# EAGLE board InkTime_Board (EAGLE 9.7.0)
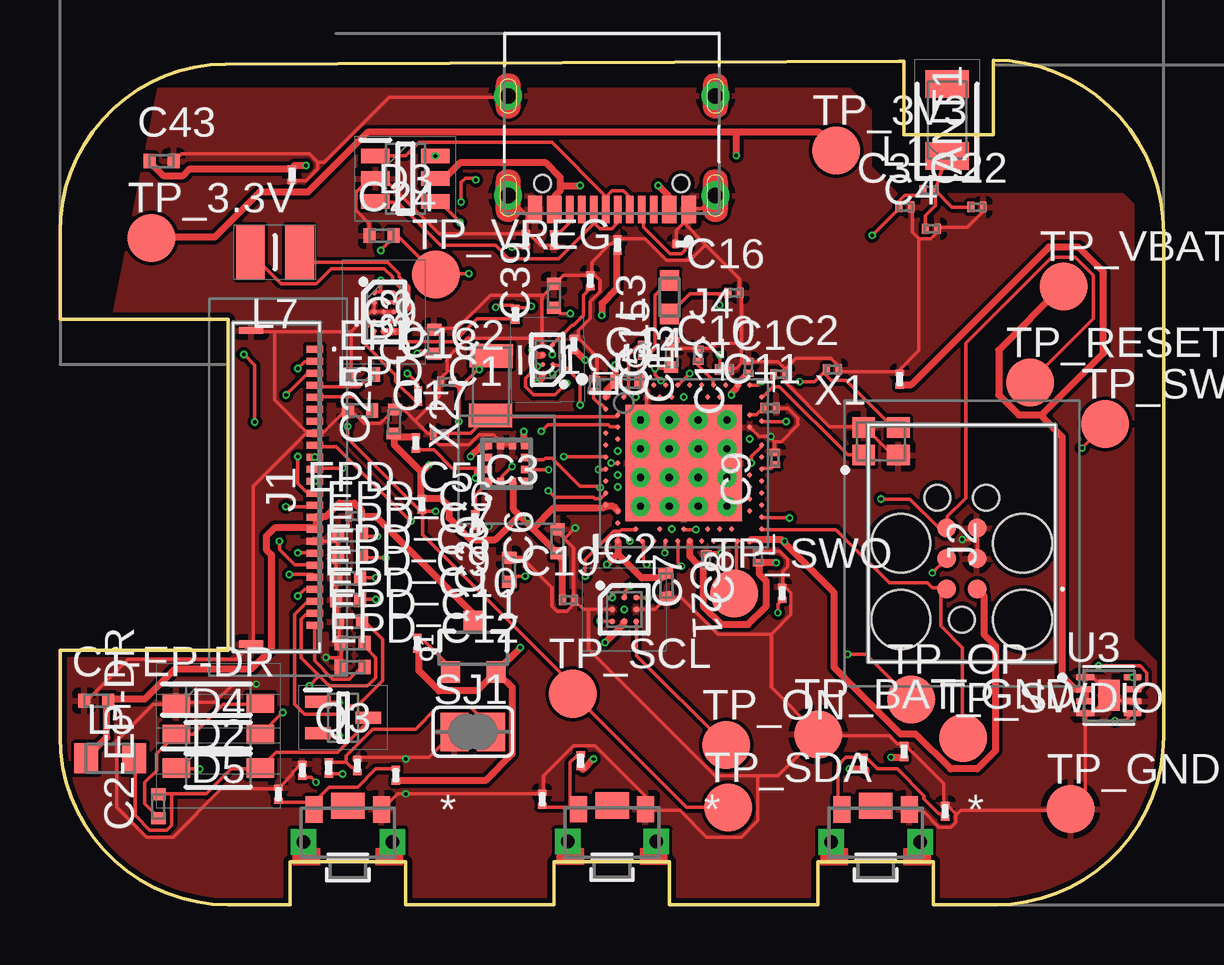
[diagram p0: board, top side]
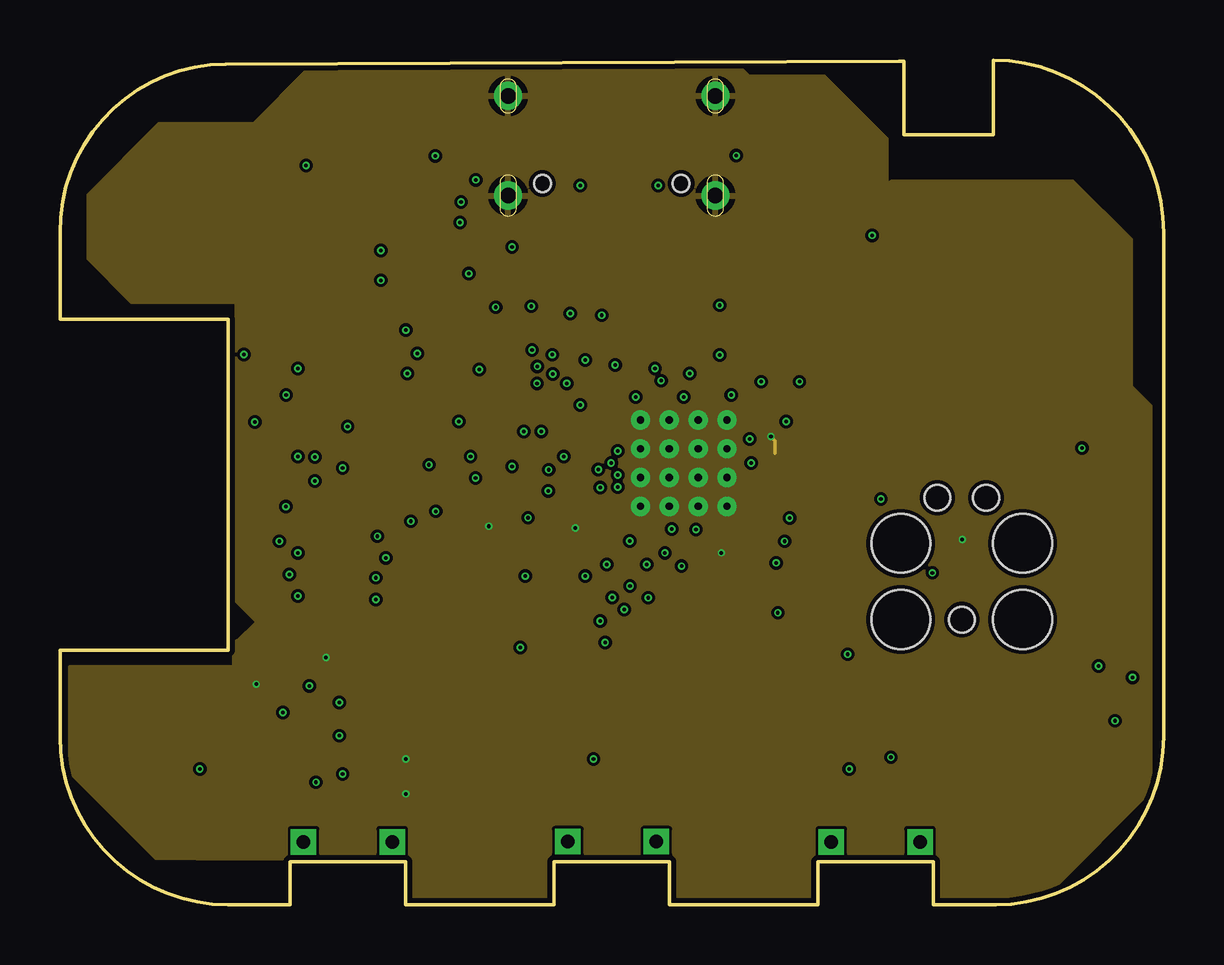
[diagram p1: board, inner layer Route2]
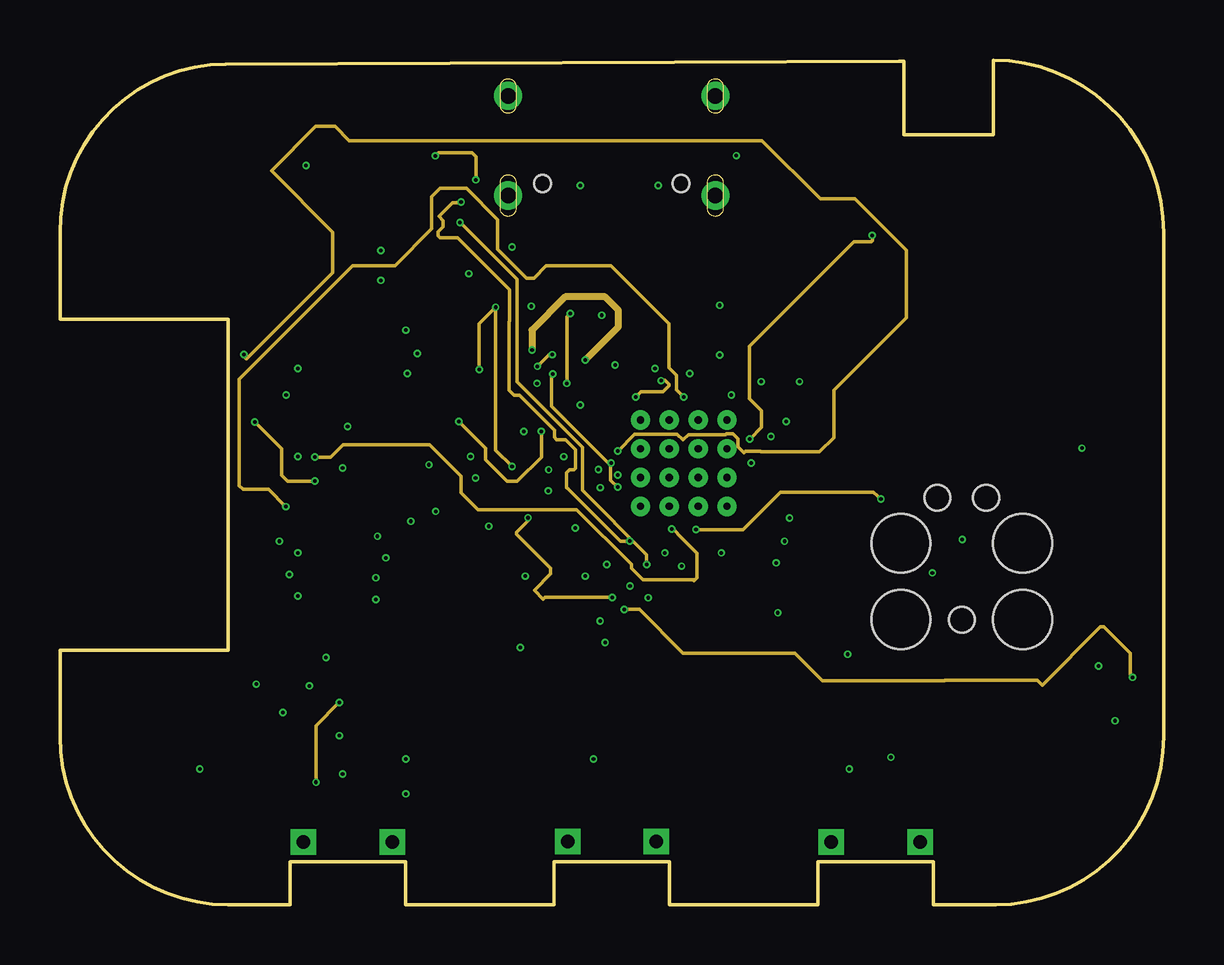
[diagram p2: board, inner layer Route15]
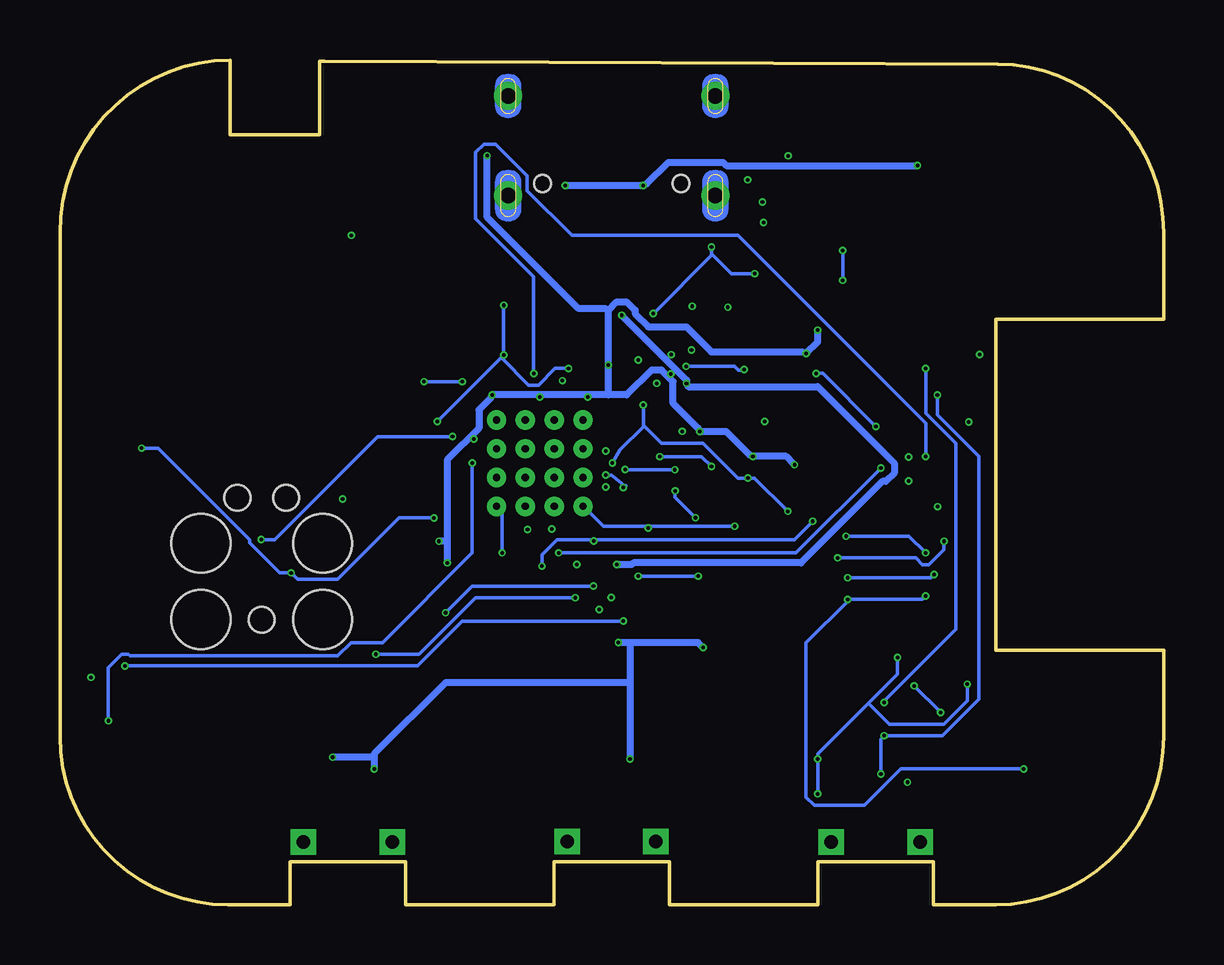
[diagram p3: board, bottom side, seen from below]

Size 46 x 35.2 mm. Coordinates in mm from the lower left corner, seen from the top.
Outline: 39,0 36.4,0 36.4,1.8 31.6,1.8 31.6,0 25.4,0 25.4,1.8 20.6,1.8 20.6,0 14.4,0 14.4,1.8 9.6,1.8 9.6,0 7,0 arc-90 0,7 0,10.6 7,10.6 7,24.4 0,24.4 0,28 arc-90 6.9,35.02 34.98,35.15 35.17,35.15 35.17,32.08 38.91,32.08 38.91,35.2 arc-90 46,28 46,7 arc-90 39,0
Copper layers (1+2*15+16): Top 0.035mm / dielectric 1.6mm / Route2 0.035mm / dielectric 0.15mm / Route15 0.035mm / dielectric 0.2mm / Bottom 0.035mm
Design rules "jlcpcb-2layers.dru *": minimum track width 0.15mm, minimum drill 0.15mm, track to track 5mil, track to pad 5mil, pad to pad 5mil, via to via 5mil, smd to smd 5mil, copper to edge 0.2mm, drill to drill 6mil, minimum pad ring 10mil, minimum via ring 3mil, stop-mask expansion 4mil, vias tented up to drill 0mil, thermal gap 10mil
Net classes: 0 default: width 0.15 mm; 2 Power: width 0.12 mm

## Footprints (pad centres in the part's own frame; a part is rotated, then mirrored left to right if it is on the bottom)
2450AT18B100E_ANTC3216X140N = smd 1.15 x 1.8: 1 -1.5,0; 2 1.5,0
NORDIC_NRF_3_RESC0201_L = smd 0.28 x 0.43: 1 -0.255,0; 2 0.255,0
NORDIC_NRF_3_RESC0402_L = smd 0.5 x 0.6: 1 -0.5,0; 2 0.5,0
GRM011R60J152KE01L_1_0201 = smd 0.35 x 0.25: 1 0,0.275; 2 0,-0.275
ESP32_C6_LIBRARY_5_SOD3716X135N = smd 1.15 x 0.8: 1 -1.75,0; 2 1.75,0
ESP32_C6_LIBRARY_3_SOT95P280X145-6N = smd 1.2 x 0.6: 1 -1.25,0.95; 2 -1.25,0; 3 -1.25,-0.95; 4 1.25,-0.95; 5 1.25,0; 6 1.25,0.95
BQ25180YBGR_BGA8C40P2X4_100X155X50 = smd 0.2 x 0.2: A1 -0.2,0.6; A2 0.2,0.6; B1 -0.2,0.2; B2 0.2,0.2; C1 -0.2,-0.2; C2 0.2,-0.2; D1 -0.2,-0.6; D2 0.2,-0.6
DRV2605YZFR_BGA9C50P3X3_144X144X62 = smd 0.25 x 0.25: A1 -0.5,0.5; A2 0,0.5; A3 0.5,0.5; B1 -0.5,0; B2 0,0; B3 0.5,0; C1 -0.5,-0.5; C2 0,-0.5; C3 0.5,-0.5
BMA423_BMA423 = smd 0.3 x 0.35: 1 -0.75,-0.775; 2 -0.25,-0.775; 3 0.25,-0.775; 4 0.75,-0.775; 7 0.75,0.775; 8 0.25,0.775; 9 -0.25,0.775; 10 -0.75,0.775 | smd 0.35 x 0.3: 5 0.775,-0.25; 6 0.775,0.25; 11 -0.775,0.25; 12 -0.775,-0.25
RT6160AWSC_BGA15C40P3X5_140X230X60 = smd 0.216 x 0.216: A1 -0.4,0.8; A2 0,0.8; A3 0.4,0.8; B1 -0.4,0.4; B2 0,0.4; B3 0.4,0.4; C1 -0.4,0; C2 0,0; C3 0.4,0; D1 -0.4,-0.4; D2 0,-0.4; D3 0.4,-0.4; E1 -0.4,-0.8; E2 0,-0.8; E3 0.4,-0.8
503480-2400_5034802400 = smd 0.3 x 0.7: 1 -5.75,1.525; 2 -5.25,1.525; 3 -4.75,1.525; 4 -4.25,1.525; 5 -3.75,1.525; 6 -3.25,1.525; 7 -2.75,1.525; 8 -2.25,1.525; 9 -1.75,1.525; 10 -1.25,1.525; 11 -0.75,1.525; 12 -0.25,1.525; 13 0.25,1.525; 14 0.75,1.525; 15 1.25,1.525; 16 1.75,1.525; 17 2.25,1.525; 18 2.75,1.525; 19 3.25,1.525; 20 3.75,1.525; 21 4.25,1.525; 22 4.75,1.525; 23 5.25,1.525; 24 5.75,1.525 | smd 0.3 x 1: MP1 -6.54,-1.125; MP2 6.54,-1.125
TC2030-IDC_TC2030IDC = smd 0.783 x 0.783: 1 -0.953,-0.635; 2 -0.953,0.635; 3 0.317,-0.635; 4 0.317,0.635; 5 1.588,-0.635; 6 1.588,0.635 | hole 2.451: -2.223,-2.54; -2.223,2.54; 0.952,-2.54; 0.952,2.54 | hole 1.067: -2.223,0; 2.857,-1.016; 2.857,1.016
KH-TYPE-C-16P_KINGHELM_KH-TYPE-C-16P = smd 0.6 x 1.15: A1_B12 -3.2,4.725; A4_B9 -2.4,4.725; A9_B4 2.4,4.725; A12_B1 3.2,4.725 | smd 0.3 x 1.15: A5 -1.25,4.725; A6 -0.25,4.725; A7 0.25,4.725; A8 1.25,4.725; B5 1.75,4.725; B6 0.75,4.725; B7 -0.75,4.725; B8 -1.75,4.725 | drill 0.65 pad 1.05: SH1 -4.32,0; SH2 4.32,0; SH3 -4.32,4.15; SH4 4.32,4.15 | hole 0.7: -2.89,3.65; 2.89,3.65
NORDIC_NRF_2_RESC0201_L = smd 0.28 x 0.43: 1 -0.255,0; 2 0.255,0
NORDIC_NRF_2_RESC0603_L = smd 0.85 x 0.8: 1 -0.7,0; 2 0.7,0
NORDIC_NRF_2_RESC0805_L = smd 1 x 1.25: 1 -1,0; 2 1,0
MLP2016SR47MT0S1_INDC2016X100N = smd 1.2 x 2.2: 1 -1.028,0; 2 1.028,0
ESP32_C6_LIBRARY_4_ESP32_C6_LIBRARY_4_ESP32_C6_LIBRARY_4_ESP32_C6_LIBRARY_4_ESP32_WROVER_SPARKFUN-DISCRETESEMI_SOT23-3 = smd 0.8 x 0.9: 1 -0.95,-1; 2 0.95,-1; 3 0,1.1
ESP32_C6_LIBRARY_6_SOT65P210X110-3N = smd 1.05 x 0.5: 1 -1.05,0.65; 2 -1.05,-0.65; 3 1.05,0
ERA-1AEB3401C_0201 = smd 0.35 x 0.25: 1 0,0.275; 2 0,-0.275
CPF0201D7K68C1_0201 = smd 0.35 x 0.25: 1 0,0.275; 2 0,-0.275
ESP32_C6_LIBRARY_7_JUMPER_SJ = smd 1.168 x 1.6: 1 -0.762,0; 2 0.762,0
2025-10-22_07-23-44_LIBRARY_SW_EVP-AKE31A_PAN = smd 0.711 x 1.092: 1 -1.4,-0.972; 2 1.4,-0.972 | drill 0.559 pad 0.914 square: 3 -1.848,0.381; 4 1.848,0.381 | smd 1.397 x 1.092: 5 0,-1.124
HECTOR_WATCH_1_TP20R = smd 2 x 2: TP 0,0
NORDIC_NRF_4_AQFN50P700X700X85_HS-74N = smd 4.85 x 4.85: P$74 0,0 | drill 0.3 pad 0.6: P$75 -1.8,1.8; P$76 -0.6,1.8; P$77 0.6,1.8; P$78 1.8,1.8; P$79 -1.8,0.6; P$80 -0.6,0.6; P$81 0.6,0.6; P$82 1.8,0.6; P$83 -1.8,-0.6; P$84 -0.6,-0.6; P$85 0.6,-0.6; P$86 1.8,-0.6; P$87 -1.8,-1.8; P$88 -0.6,-1.8; P$89 0.6,-1.8; P$90 1.8,-1.8 | smd 0.2 x 0.2: P$A8 -1.25,3.25; P$A10 -0.75,3.25; P$A12 -0.25,3.25; P$A14 0.25,3.25; P$A16 0.75,3.25; P$A18 1.25,3.25; P$A20 1.75,3.25; P$A22 2.25,3.25; P$A23 2.75,3.25; P$AA24 3.25,-2.25; P$AB2 -2.75,-2.5; P$AC5 -2,-2.75; P$AC9 -1,-2.75; P$AC11 -0.5,-2.75; P$AC13 0,-2.75; P$AC15 0.5,-2.75; P$AC17 1,-2.75; P$AC19 1.5,-2.75; P$AC21 2,-2.75; P$AC24 3.25,-2.75; P$AD2 -2.75,-3.25; P$AD4 -2.25,-3.25; P$AD6 -1.75,-3.25; P$AD8 -1.25,-3.25; P$AD10 -0.75,-3.25; P$AD12 -0.25,-3.25; P$AD14 0.25,-3.25; P$AD16 0.75,-3.25; P$AD18 1.25,-3.25; P$AD20 1.75,-3.25; P$AD22 2.25,-3.25; P$AD23 2.75,-3.25; P$B1 -3.25,2.75; P$B3 -2.5,2.75; P$B5 -2,2.75; P$B7 -1.5,2.75; P$B9 -1,2.75; P$B11 -0.5,2.75; P$B13 0,2.75; P$B15 0.5,2.75; P$B17 1,2.75; P$B19 1.5,2.75; P$B24 3.25,2.75; P$C1 -3.25,2.25; P$D2 -2.75,2; P$D23 2.75,2; P$E24 3.25,1.75; P$F2 -2.75,1.5; P$F23 2.75,1.5; P$G1 -3.25,1.25; P$H2 -2.75,1; P$H23 2.75,1; P$J1 -3.25,0.75; P$J24 3.25,0.75; P$K2 -2.75,0.5; P$L1 -3.25,0.25; P$L24 3.25,0.25; P$M2 -2.75,0; P$N1 -3.25,-0.25; P$N24 3.25,-0.25; P$P2 -2.75,-0.5; P$P23 2.75,-0.5; P$R1 -3.25,-0.75; P$R24 3.25,-0.75; P$T2 -2.75,-1; P$T23 2.75,-1; P$U1 -3.25,-1.25; P$U24 3.25,-1.25; P$V23 2.75,-1.5; P$W1 -3.25,-1.75; P$W24 3.25,-1.75; P$Y2 -2.75,-2; P$Y23 2.75,-2
ESP32_C6_LIBRARY_SON50P200X200X80-9N = smd 0.76 x 0.27: 1 -0.985,0.75; 2 -0.985,0.25; 3 -0.985,-0.25; 4 -0.985,-0.75; 5 0.985,-0.75; 6 0.985,-0.25; 7 0.985,0.25; 8 0.985,0.75 | smd 0.9 x 1.3: 9 0,0
NORDIC_NRF_BT-XTAL_2016_N = smd 0.95 x 0.85: 1 -0.725,-0.575; 2 0.725,-0.575; 3 0.725,0.575; 4 -0.725,0.575
NORDIC_NRF_1_XTAL_3215_N = smd 1 x 1.8: 1 -1.25,0; 2 1.25,0

## Placement (x,y rotation side)
ANT1  2450AT18B100E_2450AT18B100E  [2450AT18B100E_ANTC3216X140N]  36.98,32.7 90 top
C1  12pF  [NORDIC_NRF_3_RESC0201_L]  30,22.1 0 top
C1-EP-DR  10uF  [NORDIC_NRF_3_RESC0402_L]  1.5,8.5 0 top
C2  12pF  [NORDIC_NRF_3_RESC0201_L]  32.2,22.3 0 top
C2-EP-DR  4.7uF/50V  [NORDIC_NRF_3_RESC0402_L]  4.1,4.1 90 top
C3  1pF  [NORDIC_NRF_3_RESC0201_L]  35.22,29.07 0 top
C4  1pF  [NORDIC_NRF_3_RESC0201_L]  36.32,28.17 0 top
C5  100nF  [NORDIC_NRF_3_RESC0201_L]  22.25,21.65 262.9 top
C6  4.7µF  [NORDIC_NRF_3_RESC0402_L]  20.74,15.15 90 top
C7  100nF  [NORDIC_NRF_3_RESC0201_L]  26.94,14.37 90 top
C8  100nF  [NORDIC_NRF_3_RESC0201_L]  29.1,14.5 90 top
C9  820pF  [NORDIC_NRF_3_RESC0201_L]  29.8,18.6 90 top
C10  N. C.  [NORDIC_NRF_3_RESC0201_L]  27.7,22.3 0 top
C11  100pF  [NORDIC_NRF_3_RESC0201_L]  29.6,20.7 0 top
C12  100nF  [NORDIC_NRF_3_RESC0201_L]  28.7,22.4 90 top
C13  N. C.  [NORDIC_NRF_3_RESC0201_L]  26.6,22.9 90 top
C14  4.7µF  [NORDIC_NRF_3_RESC0402_L]  23.7,21.8 0 top
C15  1µF  [NORDIC_NRF_3_RESC0402_L]  25.5,22.9 87.6 top
C16  47nF  [NORDIC_NRF_3_RESC0201_L]  28.1,25.5 0 top
C17  12pF  [NORDIC_NRF_3_RESC0201_L]  15.82,19.6 0 top
C18  12pF  [NORDIC_NRF_3_RESC0201_L]  16.12,21.79 0 top
C19  100nF  [NORDIC_NRF_3_RESC0201_L]  21.2,12.7 0 top
C20  4.7µF  [NORDIC_NRF_3_RESC0402_L]  18.73,13.96 90 top
C21  4.7µF  [NORDIC_NRF_3_RESC0402_L]  25.28,13.31 272.3 top
C22  N. C.  [NORDIC_NRF_3_RESC0201_L]  38.22,29.07 0 top
C23  0.1uF  [GRM011R60J152KE01L_1_0201]  19.42,27.72 0 top
C24  10uF  [NORDIC_NRF_3_RESC0402_L]  13.41,27.88 0 top
C25  22uF  [NORDIC_NRF_3_RESC0402_L]  13.94,20.14 87.5 top
C27  0.1uF  [GRM011R60J152KE01L_1_0201]  35,21.9 0 top
C29  1uF  [GRM011R60J152KE01L_1_0201]  9.1,4.6 0 top
C30  1uF  [GRM011R60J152KE01L_1_0201]  36.9,3.9 0 top
C31  1uF  [GRM011R60J152KE01L_1_0201]  20.1,4.4 0 top
C32  1uF  [GRM011R60J152KE01L_1_0201]  30.1,12.98 0 top
C33  22uF  [NORDIC_NRF_3_RESC0402_L]  15.6,23.46 90 top
C34  0.1uF  [GRM011R60J152KE01L_1_0201]  35.18,6.38 0 top
C37  1uF  [GRM011R60J152KE01L_1_0201]  21.42,23.35 0 top
C38  1uF  [GRM011R60J152KE01L_1_0201]  23.24,27.49 0 top
C39  10uF  [NORDIC_NRF_3_RESC0402_L]  20.6,25.36 90 top
C42  0.1uF  [GRM011R60J152KE01L_1_0201]  9.67,30.42 0 top
C43  4.7uF  [NORDIC_NRF_3_RESC0402_L]  4.23,30.99 0 top
D2  MBR0530  [ESP32_C6_LIBRARY_5_SOD3716X135N]  6.6,7.1 0 top
D3  ESP32_C6_LIBRARY_3_USBLC6-2SC6Y  [ESP32_C6_LIBRARY_3_SOT95P280X145-6N]  14.4,30.25 0 top
D4  MBR0530  [ESP32_C6_LIBRARY_5_SOD3716X135N]  6.6,8.4 0 top
D5  MBR0530  [ESP32_C6_LIBRARY_5_SOD3716X135N]  6.6,5.7 0 top
EPD_C1  1uF/50V  [NORDIC_NRF_3_RESC0402_L]  12.5,20.6 0 top
EPD_C2  1uF/50V  [NORDIC_NRF_3_RESC0402_L]  12.6,22.1 0 top
EPD_C5  0.1uF/50V  [NORDIC_NRF_3_RESC0201_L]  12.3,16.2 0 top
EPD_C6  1uF/50V  [NORDIC_NRF_3_RESC0402_L]  12.1,15.4 0 top
EPD_C7  1uF/50V  [NORDIC_NRF_3_RESC0402_L]  12.1,14.5 0 top
EPD_C8  1uF/50V  [NORDIC_NRF_3_RESC0402_L]  12,13.6 0 top
EPD_C9  1uF/50V  [NORDIC_NRF_3_RESC0402_L]  12,12.7 0 top
EPD_C10  1uF/50V  [NORDIC_NRF_3_RESC0402_L]  12.1,11.8 0 top
EPD_C11  1uF/50V  [NORDIC_NRF_3_RESC0402_L]  12.2,10.9 0 top
EPD_C12  1uF/50V  [NORDIC_NRF_3_RESC0402_L]  12.2,9.9 0 top
IC1  BQ25180YBGR_BQ25180YBGR  [BQ25180YBGR_BGA8C40P2X4_100X155X50]  20.33,22.71 180.9 top
IC2  DRV2605YZFR_DRV2605YZFR  [DRV2605YZFR_BGA9C50P3X3_144X144X62]  23.52,12.31 0 top
IC3  BMA423_BMA423  [BMA423_BMA423]  18.62,18.38 0 top
IC9  RT6160AWSC_RT6160AWSC  [RT6160AWSC_BGA15C40P3X5_140X230X60]  13.51,24.7 0 top
J1  503480-2400_503480-2400  [503480-2400_5034802400]  9.1,17.4 270 top
J2  TC2030-IDC_TC2030-IDC  [TC2030-IDC_TC2030IDC]  37.59,14.1 90 top
J4  KH-TYPE-C-16P_KH-TYPE-C-16P  [KH-TYPE-C-16P_KINGHELM_KH-TYPE-C-16P]  23,33.7 180 top
L1  3.9nH  [NORDIC_NRF_2_RESC0201_L]  36.22,29.77 0 top
L2  15nH  [NORDIC_NRF_2_RESC0201_L]  24.3,23.1 90 top
L3  10µH  [NORDIC_NRF_2_RESC0603_L]  25.41,25.32 90 top
L5  68uH  [NORDIC_NRF_2_RESC0805_L]  2.1,6.1 0 top
L7  MLP2016SR47MT0S1_FTC252012SR47MBCA  [MLP2016SR47MT0S1_INDC2016X100N]  8.96,27.18 0 top
Q1  20V/4.2A/52mΩ/1.4W  [ESP32_C6_LIBRARY_4_ESP32_C6_LIBRARY_4_ESP32_C6_LIBRARY_4_ESP32_C6_LIBRARY_4_ESP32_WROVER_SPARKFUN-DISCRETESEMI_SOT23-3]  17.23,10.69 0 top
Q3  ESP32_C6_LIBRARY_6_SI1308EDL-T1-GE3  [ESP32_C6_LIBRARY_6_SOT65P210X110-3N]  11.8,7.8 0 top
R1_EP_DR  0.47  [ERA-1AEB3401C_0201]  11.2,5.7 0 top
R1_USB  5K1  [ERA-1AEB3401C_0201]  25.94,27.53 90 top
R2  0  [CPF0201D7K68C1_0201]  18.99,24.6 0 top
R2_EP_DR  10K  [ERA-1AEB3401C_0201]  10.1,5.6 0 top
R2_USB  5K1  [ERA-1AEB3401C_0201]  20.6,27.7 0 top
R3  0  [CPF0201D7K68C1_0201]  17.3,16.03 180 top
R4  0  [CPF0201D7K68C1_0201]  14.93,21.2 0 top
R5  10k  [ERA-1AEB3401C_0201]  33.5,5.9 0 top
R7  10k  [ERA-1AEB3401C_0201]  14,5.4 0 top
R8  10k  [ERA-1AEB3401C_0201]  21.7,6 0 top
R9  10K  [CPF0201D7K68C1_0201]  22.1,26 0 top
R17  3K3  [CPF0201D7K68C1_0201]  14.84,19.24 0 top
R18  3K3  [CPF0201D7K68C1_0201]  15.08,16.68 0 top
R_PWR_EPD  10k  [ERA-1AEB3401C_0201]  14.9,10.9 0 top
R_TYPE_SEL  2.2  [ERA-1AEB3401C_0201]  12.4,5.8 0 top
SJ1  [ESP32_C6_LIBRARY_7_JUMPER_SJ]  17.21,7.2 0 top
SW_DN  2025-10-22_07-23-44_LIBRARY_EVP-AKE31ASW_EVP-AKE31A_PAN  [2025-10-22_07-23-44_LIBRARY_SW_EVP-AKE31A_PAN]  12,3 180 top
SW_ENT  2025-10-22_07-23-44_LIBRARY_EVP-AKE31ASW_EVP-AKE31A_PAN  [2025-10-22_07-23-44_LIBRARY_SW_EVP-AKE31A_PAN]  23.01,3.01 180 top
SW_UP  2025-10-22_07-23-44_LIBRARY_EVP-AKE31ASW_EVP-AKE31A_PAN  [2025-10-22_07-23-44_LIBRARY_SW_EVP-AKE31A_PAN]  34,3 180 top
TP_3.3V  HECTOR_WATCH_1_TPTP20R  [HECTOR_WATCH_1_TP20R]  3.82,27.79 0 top
TP_3V3  HECTOR_WATCH_1_TPTP20R  [HECTOR_WATCH_1_TP20R]  32.36,31.43 0 top
TP_BAT_GND  HECTOR_WATCH_1_TPTP20R  [HECTOR_WATCH_1_TP20R]  31.6,7.1 0 top
TP_GND  HECTOR_WATCH_1_TPTP20R  [HECTOR_WATCH_1_TP20R]  42.13,3.98 0 top
TP_ON  HECTOR_WATCH_1_TPTP20R  [HECTOR_WATCH_1_TP20R]  27.77,6.65 0 top
TP_OP  HECTOR_WATCH_1_TPTP20R  [HECTOR_WATCH_1_TP20R]  35.48,8.55 0 top
TP_RESET  HECTOR_WATCH_1_TPTP20R  [HECTOR_WATCH_1_TP20R]  40.43,21.75 0 top
TP_SCL  HECTOR_WATCH_1_TPTP20R  [HECTOR_WATCH_1_TP20R]  21.37,8.79 0 top
TP_SDA  HECTOR_WATCH_1_TPTP20R  [HECTOR_WATCH_1_TP20R]  27.86,4.05 0 top
TP_SWDCLK  HECTOR_WATCH_1_TPTP20R  [HECTOR_WATCH_1_TP20R]  43.57,20.03 0 top
TP_SWDIO  HECTOR_WATCH_1_TPTP20R  [HECTOR_WATCH_1_TP20R]  37.65,6.95 0 top
TP_SWO  HECTOR_WATCH_1_TPTP20R  [HECTOR_WATCH_1_TP20R]  28.11,12.97 0 top
TP_VBAT  HECTOR_WATCH_1_TPTP20R  [HECTOR_WATCH_1_TP20R]  41.83,25.77 0 top
TP_VREG  HECTOR_WATCH_1_TPTP20R  [HECTOR_WATCH_1_TP20R]  15.66,26.25 0 top
U1  NORDIC_NRF_4_NRF52840_QF  [NORDIC_NRF_4_AQFN50P700X700X85_HS-74N]  26,18.4 0 top
U3  ESP32_C6_LIBRARY_MAX17048G+T10  [ESP32_C6_LIBRARY_SON50P200X200X80-9N]  43.72,8.73 0 top
X1  32MHz  [NORDIC_NRF_BT-XTAL_2016_N]  34.23,19.31 0 top
X2  32.768kHz  [NORDIC_NRF_1_XTAL_3215_N]  17.96,21.63 89.2 top

## Library data of the parts
ANT1 = InkTime_v5; ARROW_PART_NUMBER: 2450AT18B100E; ARROW_PRICE-STOCK: https://www.arrow.com/en/products/2450at18b100e/johanson-dielectrics?utm_currency=USD&region=nac; DESCRIPTION: Antennas 2.45GHz ANTENNA; HEIGHT: 1.4mm; MANUFACTURER_NAME: JOHANSON TECHNOLOGY; MANUFACTURER_PART_NUMBER: 2450AT18B100E; MOUSER_PART_NUMBER: 609-2450AT18B100E; MOUSER_PRICE-STOCK: https://www.mouser.co.uk/ProductDetail/Johanson-Technology/2450AT18B100E?qs=yCnrNFeXz%252Bh5MFsFIXGZGA%3D%3D
C1 C1-EP-DR C2 C2-EP-DR C3-C25 C27 C29-C34 C37-C39 C42 C43 EPD_C1 EPD_C2 EPD_C5-EPD_C12 L1-L3 L5 R1_EP_DR R1_USB R2 R2_EP_DR R2_USB R3-R5 R7-R9 R17 R18 R_PWR_EPD R_TYPE_SEL SJ1 TP_3.3V TP_3V3 TP_BAT_GND TP_GND TP_ON TP_OP TP_RESET TP_SCL TP_SDA TP_SWDCLK TP_SWDIO TP_SWO TP_VBAT TP_VREG U1 X1 X2 = InkTime_v5
D2 D4 D5 = InkTime_v5; AVAILABILITY: In Stock; CHECK_PRICES: https://www.snapeda.com/parts/MBR0530/Onsemi/view-part/?ref=eda; DESCRIPTION: Diode Schottky 30 V 500mA Surface Mount SOD-123; MF: ON Semiconductor; MP: MBR0530; PACKAGE: SOD-123-2 ON Semiconductor; PRICE: None; PURCHASE-URL: https://www.snapeda.com/api/url_track_click_mouser/?unipart_id=179458&manufacturer=ON Semiconductor&part_name=MBR0530&search_term=None; SNAPEDA_LINK: https://www.snapeda.com/parts/MBR0530/Onsemi/view-part/?ref=snap
D3 = InkTime_v5; AVAILABILITY: In Stock; CHECK_PRICES: https://www.snapeda.com/parts/USBLC6-2SC6Y/STMicroelectronics/view-part/?ref=eda; DESCRIPTION: 17V Clamp 5A (8/20µs) Ipp Tvs Diode Surface Mount SOT-23-6; MF: STMicroelectronics; MP: USBLC6-2SC6Y; PACKAGE: SOT-23-6 STMicroelectronics; PRICE: None; SNAPEDA_LINK: https://www.snapeda.com/parts/USBLC6-2SC6Y/STMicroelectronics/view-part/?ref=snap
IC1 = InkTime_v5; ARROW_PART_NUMBER: BQ25180YBGR; ARROW_PRICE-STOCK: https://www.arrow.com/en/products/bq25180ybgr/texas-instruments?utm_currency=USD&region=nac; DESCRIPTION: Charger IC Lithium Ion/Polymer, Lithium Iron Phosphate 8-DSBGA (1.6x1.1); HEIGHT: 0.5mm; MANUFACTURER_NAME: Texas Instruments; MANUFACTURER_PART_NUMBER: BQ25180YBGR; MOUSER_PART_NUMBER: 595-BQ25180YBGR; MOUSER_PRICE-STOCK: https://www.mouser.co.uk/ProductDetail/Texas-Instruments/BQ25180YBGR?qs=doiCPypUmgEWjAK%252BJAX6Tw%3D%3D
IC2 = InkTime_v5; ARROW_PART_NUMBER: DRV2605YZFR; ARROW_PRICE-STOCK: https://www.arrow.com/en/products/drv2605yzfr/texas-instruments?region=nac; DESCRIPTION: Haptic Driver for ERM/LRA with Built-In Library and Smart Loop Architecture; HEIGHT: 0.625mm; MANUFACTURER_NAME: Texas Instruments; MANUFACTURER_PART_NUMBER: DRV2605YZFR
IC3 = InkTime_v5; ARROW_PART_NUMBER: BMA423; ARROW_PRICE-STOCK: https://www.arrow.com/en/products/bma423/bosch; DESCRIPTION: Accelerometers Triaxial low-g 12bit Acceleration Sensor; HEIGHT: 1mm; MANUFACTURER_NAME: BOSCH; MANUFACTURER_PART_NUMBER: BMA423; MOUSER_PART_NUMBER: 262-BMA423; MOUSER_PRICE-STOCK: https://www.mouser.co.uk/ProductDetail/Bosch-Sensortec/BMA423?qs=HXFqYaX1Q2xC%252BSgeGoX3mg%3D%3D
IC9 = InkTime_v5; DESCRIPTION: Buck-Boost Regulator Positive Output Step-Up/Step-Down I2C DC-DC Controller IC 15-WL-CSP (BSC) (1.4x2.3); HEIGHT: 0.6mm; MANUFACTURER_NAME: RICHTEK; MANUFACTURER_PART_NUMBER: RT6160AWSC; MOUSER_PART_NUMBER: 835-RT6160AWSC; MOUSER_PRICE-STOCK: https://www.mouser.co.uk/ProductDetail/Richtek/RT6160AWSC?qs=amGC7iS6iy%2FLd9PSoixZXQ%3D%3D
J1 = InkTime_v5; DESCRIPTION: FFC & FPC Connectors 0.5mm FPC RA SMT Dual Contact 24Ckt; HEIGHT: 1.87mm; MANUFACTURER_NAME: Molex; MANUFACTURER_PART_NUMBER: 503480-2400; MOUSER_PART_NUMBER: 538-503480-2400; MOUSER_PRICE-STOCK: https://www.mouser.co.uk/ProductDetail/Molex/503480-2400?qs=OAhjpuo3Vu7efIoxFh9AOw%3D%3D
J2 = InkTime_v5; DESCRIPTION: CABLE ADAPTER 6 POS; HEIGHT: 19mm; MANUFACTURER_NAME: Tag Connect; MANUFACTURER_PART_NUMBER: TC2030-IDC
J4 = InkTime_v5; AVAILABILITY: Not in stock; CHECK_PRICES: https://www.snapeda.com/parts/KH-TYPE-C-16P/Kinghelm/view-part/?ref=eda; MF: kinghelm; MP: KH-TYPE-C-16P; PACKAGE: None; PRICE: None; SNAPEDA_LINK: https://www.snapeda.com/parts/KH-TYPE-C-16P/Kinghelm/view-part/?ref=snap
L7 = InkTime_v5; DESCRIPTION: SMD / SMT Inductors (Coils), L=0.47?H, L x W x T :; HEIGHT: 1mm; JLCPCB: https://jlcpcb.com/partdetail/6763488-FTC252012SR47MBCA/C5832368; MANUFACTURER_NAME: TDK; MANUFACTURER_PART_NUMBER: FTC252012SR47MBCA
Q1 = InkTime_v5; PROD_ID: TRAN-14388
Q3 = InkTime_v5; AVAILABILITY: In Stock; CHECK_PRICES: https://www.snapeda.com/parts/SI1308EDL-T1-GE3/Vishay+Siliconix/view-part/?ref=eda; DESCRIPTION: Si1308EDL-T1-GE3 N-channel MOSFET Transistor, 1.5 A, 30 V, 3-Pin SC-70 | Siliconix / Vishay SI1308EDL-T1-GE3; MF: Vishay Siliconix; MP: SI1308EDL-T1-GE3; PACKAGE: SOT-323 Vishay Semiconductor; PRICE: None; PURCHASE-URL: https://www.snapeda.com/api/url_track_click_mouser/?unipart_id=274603&manufacturer=Vishay Siliconix&part_name=SI1308EDL-T1-GE3&search_term=None; SNAPEDA_LINK: https://www.snapeda.com/parts/SI1308EDL-T1-GE3/Vishay+Siliconix/view-part/?ref=snap
SW_DN SW_ENT SW_UP = InkTime_v5; COPYRIGHT: Copyright (C) 2025 Ultra Librarian. All rights reserved.; DIGI-KEY_PART_NUMBER_1: P123437TR-ND; DIGI-KEY_PART_NUMBER_2: P123437CT-ND; DIGI-KEY_PART_NUMBER_3: P123437DKR-ND; MANUFACTURER_NAME: Panasonic; MANUFACTURER_PART_NUMBER: EVP-AKE31A
U3 = InkTime_v5; AVAILABILITY: In Stock; CHECK_PRICES: https://www.snapeda.com/parts/MAX17048G+T10/Analog+Devices/view-part/?ref=eda; DESCRIPTION: 3µA 1-Cell/2-Cell Fuel Gauge with ModelGauge; MF: Analog Devices; MP: MAX17048G+T10; PACKAGE: TDFN-8 Maxim; PRICE: None; PURCHASE-URL: https://www.snapeda.com/api/url_track_click_mouser/?unipart_id=329239&manufacturer=Analog Devices&part_name=MAX17048G+T10&search_term=None; SNAPEDA_LINK: https://www.snapeda.com/parts/MAX17048G+T10/Analog+Devices/view-part/?ref=snap

## Nets
3V3/1.7D [Power]: C34.2 IC2.C2 Q1.2 R5.2 R7.2 R8.2 R_PWR_EPD.2
3V3/2.4A [Power]: C6.1 C7.1 C8.1 C12.1 C14.1 C19.1 C25.1 C33.1 IC3.3 IC3.7 IC3.10 IC9.E2 IC9.E3 J2.1 R17.1 R18.1 TP_3.3V.TP TP_3V3.TP U1.P$A22 U1.P$AD14 U1.P$AD23 U1.P$B1 U1.P$W1 U1.P$Y2
ALERT: U1.P$J24 U3.5
D+: D3.4 U1.P$AD6
D-: D3.6 U1.P$AD4
DN: D3.1 J4.A7 J4.B7
DP: D3.3 J4.A6 J4.B6
EPD_3V3 [Power]: C1-EP-DR.2 EPD_C5.2 J1.15 J1.16 L5.1 Q1.3
EPD_BUSY: J1.9 U1.P$AD12
EPD_CS: J1.12 U1.P$K2
EPD_DC: J1.11 U1.P$AD10
EPD_RST: J1.10 U1.P$AC11
GDR: J1.2 Q3.1 R2_EP_DR.2
GND [HIGH_CURRENT]: C1-EP-DR.1 C1.2 C2.2 C3.2 C4.2 C5.1 C6.2 C7.2 C8.2 C9.2 C10.2 C11.2 C12.2 C13.2 C14.2 C15.2 C16.2 C17.1 C18.1 C19.2 C20.2 C21.2 C22.2 C23.1 C24.1 C25.2 C27.1 C29.1 C30.1 C31.1 C32.1 C33.2 C34.1 C37.1 C38.1 C39.2 C42.2 C43.2 D3.2 D4.1 EPD_C1.1 EPD_C2.1 EPD_C5.1 EPD_C6.1 EPD_C7.1 EPD_C8.1 EPD_C9.1 EPD_C10.1 EPD_C11.1 EPD_C12.1 IC1.D2 IC2.B1 IC2.B3 IC3.8 IC3.9 IC9.B1 IC9.C1 IC9.C2 IC9.C3 J1.8 J1.17 J1.MP1 J1.MP2 J2.3 J2.5 J4.A1_B12 J4.A12_B1 J4.SH1 J4.SH2 J4.SH3 J4.SH4 R1_USB.1 R2_EP_DR.1 R2_USB.2 R3.1 R9.1 R_TYPE_SEL.1 SJ1.1 SW_DN.1 SW_ENT.1 SW_UP.1 TP_BAT_GND.TP TP_GND.TP U1.P$74 U1.P$75 U1.P$76 U1.P$77 U1.P$78 U1.P$79 U1.P$80 U1.P$81 U1.P$82 U1.P$83 U1.P$84 U1.P$85 U1.P$86 U1.P$87 U1.P$88 U1.P$89 U1.P$90 U1.P$B7 U1.P$F23 U3.1 U3.4 U3.6 U3.9 X1.2 X1.4
HAPTIC_EN: IC2.A1 U1.P$U1
IMU_INT1: IC3.5 U1.P$N1
IMU_INT2: IC3.6 U1.P$P2
LX1: IC9.B2 IC9.B3 L7.1
LX2: IC9.D2 IC9.D3 L7.2
MOSI: J1.14 U1.P$B13
N$1: C5.2 U1.P$C1
N$2: L2.2 U1.P$B3
N$3: L2.1 L3.2
N$4: C2.1 U1.P$A23 X1.3
N$6: C20.1 U1.P$AC5
N$11: C9.1 U1.P$N24
N$13: C11.1 U1.P$D23
N$14: C13.1 U1.P$A18
N$15: C3.1 L1.1 U1.P$H23
N$16: C10.1 C15.1 C16.1 L3.1 U1.P$B5 U1.P$E24
N$17: ANT1.1 C4.1 C22.1 L1.2
N$18: C1.1 U1.P$B24 X1.1
N$19: C17.2 U1.P$D2 X2.1
N$20: C18.2 U1.P$F2 X2.2
N$24: IC1.D1 R9.2
N$28: IC9.E1 R2.2
N$29: IC9.D1 R4.2
N$31: IC3.1 R3.2
N$32: C32.2 IC2.A2
N$40: J4.A5 R1_USB.2
N$41: J4.B5 R2_USB.1
N$43: EPD_C2.2 J1.4
N$44: EPD_C1.2 J1.5
N$46: EPD_C6.2 J1.18
N$47: EPD_C7.2 J1.19
N$48: EPD_C8.2 J1.20
N$50: EPD_C10.2 J1.22
N$52: EPD_C12.2 J1.24
N$54: C2-EP-DR.2 D5.2 L5.2 Q3.3
N$55: C2-EP-DR.1 D2.1 D4.2
N$58: R1_EP_DR.1 R_TYPE_SEL.2 SJ1.2
OUT+: IC2.A3 TP_OP.TP
OUT-: IC2.C3 TP_ON.TP
P0.04: U1.P$J1
P0.09: U1.P$L24
P0.13: U1.P$AD8
P0.13/1.5D: C30.2 R5.1 SW_UP.2
P0.14: U1.P$AC9
P0.14/1.5D: C31.2 R8.1 SW_ENT.2
P0.19: U1.P$AC15
P0.20: U1.P$AD16
P0.21: U1.P$AC17
P0.22: U1.P$AD18
P0.23: U1.P$AC19
P0.24: U1.P$AD20
P0.25: U1.P$AC21
P0.26: U1.P$G1
P0.27: U1.P$H2
P1.01: U1.P$Y23
P1.01/1.6C: Q1.1 R_PWR_EPD.1
P1.02: U1.P$W24
P1.02/1.6C: C29.2 R7.1 SW_DN.2
P1.03: U1.P$V23
P1.04: U1.P$U24
P1.05: U1.P$T23
P1.06: U1.P$R24
P1.07: U1.P$P23
P1.09: U1.P$R1
P1.10: U1.P$A20
P1.11: U1.P$B19
P1.12: U1.P$B17
P1.13: U1.P$A16
P1.14: U1.P$B15
P1.15: U1.P$A14
P1.28: U1.P$B11
P1.29: U1.P$A10
P1.30: U1.P$B9
P1.31: U1.P$A8
PMIC_INT: IC1.A1 U1.P$T2
PREVGH: D5.1 EPD_C9.2 J1.21
PREVGL: D2.2 EPD_C11.2 J1.23
RESE: J1.3 Q3.2 R1_EP_DR.2
RESET: J2.6 TP_RESET.TP U1.P$AC13
SCK: J1.13 U1.P$A12
SCL/1.4C: IC2.C1 U3.7
SCL/2.4C: IC1.B1 IC3.12 R4.1 R17.2 R18.2 TP_SCL.TP TP_SDA.TP U1.P$M2
SDA/1.4C: IC2.B2 U3.8
SDA/2.4C: IC1.C1 IC3.2 R2.1 U1.P$L1
SWDCLK: J2.4 TP_SWDCLK.TP U1.P$AA24
SWDIO: J2.2 TP_SWDIO.TP U1.P$AC24
SWO: TP_SWO.TP U1.P$AD22
VBAT/1.2A [Power]: C27.2 TP_VBAT.TP U3.2 U3.3
VBAT/2.5C [Power]: C37.2 IC1.C2
VBUS/1.5D [Power]: C42.1 C43.1 D3.5 J4.A4_B9 J4.A9_B4
VBUS/2.6D [Power]: C21.1 C38.2 IC1.A2 U1.P$AD2
VREG: C23.2 C24.2 C39.1 IC1.B2 IC9.A1 IC9.A2 IC9.A3 TP_VREG.TP

## Tracks (layer width: path | path; a pad name or v marks a point on that pad's centre or on a via)
3V3/1.7D  (via drill 0.15, 0.15 pad 0.3)
  Top 0.3: R8.2 21.8,5.63 | 21.8,5.63 21.8,5.62 | 33.6,5.53 33.6,5.62 R5.2 33.39,5.66 v32.9,5.66 | v22.72,10.92 23.48,11.68 23.48,11.75 IC2.C2 | v19.19,10.71 18.22,9.74 Q1.2 | R7.2 14.07,5.17 17.74,5.17 18.84,6.28 18.84,9.05 18.29,9.61 Q1.2 | v22.24,6.07 21.8,5.63 | v34.63,6.14 35.12,6.14 C34.2 | R_PWR_EPD.2 14.97,10.57 14.97,9.74 15.8,8.91 17.39,8.91 18.08,9.61 Q1.2
  Bottom 0.3: 22.24,10.92 19.4,10.92 v19.19,10.71 | 22.24,10.92 v22.72,10.92 | 22.24,10.92 22.24,9.26 | 22.24,9.26 v22.24,6.07 | 32.9,6.14 32.9,6.28 29.93,9.26 22.24,9.26 | 32.9,6.14 v32.9,5.66 | 32.9,6.14 v34.63,6.14
3V3/2.4A  (via drill 0.15)
  Top 0.3: 28.19,32.18 31.66,32.18 32.35,31.49 TP_3V3.TP | 28.19,32.18 12.82,32.18 10.33,29.69 8.32,29.69 6.45,27.82 3.89,27.82 TP_3.3V.TP | 30.06,15.21 28.82,15.21 U1.P$AD23 | 30.06,15.21 32.28,13 32.28,9.88 35.05,7.11 35.67,7.11 37.13,5.66 38.23,5.66 39,6.42 39,10.78 38.51,11.27 38.51,12.86 38.23,13.14 J2.1 | 22.79,16.6 23.07,16.6 23.21,16.46 U1.P$Y2 | 22.79,16.6 U1.P$W1 | 19.71,15.66 20.71,14.66 C6.1 20.78,14.52 20.92,14.38 20.92,12.72 C19.1 | 19.71,15.66 19.16,16.22 | 19.16,16.22 18.91,16.46 18.91,17.57 IC3.3 | 19.71,15.66 20.58,16.53 22.65,16.53 22.79,16.6 | U1.P$AD14 26.25,14.52 26.6,14.18 26.88,14.18 C7.1 26.81,14.04 26.81,12.45 27.57,11.68 28.68,11.68 29.44,12.45 29.44,13.48 29.16,13.76 29.16,14.18 C8.1 29.3,14.25 v29.86,14.25 | IC9.E2 13.51,23.87 13.86,23.87 IC9.E3 14,23.87 14.34,23.87 v14.41,23.94 | v14.9,22.97 C33.1 | U1.P$B1 22.79,21.17 22.79,21.45 23.14,21.79 C14.1 23.14,21.93 v23.14,22.49 | 28.26,21.66 28.26,21.72 28.68,22.14 C12.1 | 28.26,21.66 U1.P$A22 | 15.04,18.05 15.04,17.02 R18.1 15.18,16.95 15.87,16.95 16.21,16.6 16.21,16.11 17.11,15.21 18.15,15.21 19.16,16.22 | 15.04,18.05 13.93,19.16 13.93,19.58 C25.1 14.07,19.51 R17.1 | v17.11,18.68 17.53,19.09 17.81,19.09 IC3.10 | v15.38,18.33 15.18,18.12 15.04,18.05 | v19.33,19.72 19.33,19.16 IC3.7 | v27.99,21.24 27.99,21.31 28.19,21.52 28.26,21.66 | v30.2,15.15 30.06,15.21 | v28.19,31.21 28.19,32.18
  Bottom 0.3: v14.41,23.94 14.41,23.45 v14.9,22.97 15.04,23.04 18.84,23.04 19.88,24.08 21.48,24.08 22.03,24.63 22.03,24.77 22.38,25.12 22.79,25.12 23.14,24.77 | v15.38,18.33 15.73,18.68 v17.11,18.68 17.25,18.75 18.22,19.72 v19.33,19.72 19.4,19.85 20.44,20.89 20.44,21.79 20.92,22.28 21.34,22.28 22.38,21.24 23.14,21.24 | 23.14,21.24 v27.99,21.24 28.05,21.1 28.54,20.62 28.54,19.85 29.86,18.54 29.86,15.15 | 23.14,21.24 v23.14,22.49 23.14,24.77 | 29.86,15.15 v29.86,14.25 | 29.86,15.15 v30.2,15.15 | v28.19,31.21 28.19,28.65 24.39,24.84 23.28,24.84 23.14,24.77
ALERT  (via drill 0.15)
  Top 0.15: v28.82,18.4 28.82,18.68 29.23,19.09 U1.P$J24 | v43.98,7.67 44.4,7.67 44.67,7.94 U3.5
  Bottom 0.15: v28.82,18.4 28.82,14.66 32.56,10.92 33.87,10.92 34.43,10.37 43.08,10.37 43.15,10.44 43.43,10.44 43.98,9.88 v43.98,7.67
D+  (via drill 0.15)
  Top 0.15: v24.45,14.18 24.32,14.31 24.32,15.15 U1.P$AD6 | v16.67,28.43 15.8,29.3 D3.4
  Route15 0.15: v24.45,14.18 24.45,14.59 21.78,17.27 21.78,19.06 19.05,21.79 19.05,26.05 v16.67,28.43
D-  (via drill 0.15)
  Top 0.15: v16.72,29.28 16.72,30.09 16.9,30.28 17.26,30.28 v17.34,30.2
  Route15 0.15: U1.P$AD4 23.36,15.15 21.13,17.38 21.11,17.38 21.11,17.99 21.25,18.13 21.43,18.13 21.49,18.19 21.49,18.96 21.07,19.38 20.71,19.38 20.62,19.47 20.62,19.77 19.16,21.22 18.94,21.22 18.72,21.44 18.72,24.28 18.75,24.32 18.75,25.63 16.58,27.8 15.84,27.8 15.77,27.87 15.77,28.04 15.98,28.26 15.98,28.51 15.8,28.68 | 15.8,28.68 | 15.8,28.68 16.36,29.24 16.72,29.24 v16.72,29.28 | v17.34,30.2 17.34,31.17 17.17,31.34 15.79,31.34 D3.6
  other vias: 23.75,15.15 15.65,31.2
DN
  Top 0.15: J4.B7 23.69,28.99 23.69,29.55 23.48,29.76 23,29.76 22.79,29.55 22.79,28.99 J4.A7 22.72,29.55 20.51,31.77 14.97,31.77 14.41,31.21 13.17,31.21 D3.1
DP
  Top 0.15: 22.31,28.37 22.31,28.93 J4.B6 | 22.31,28.37 22.52,28.16 23,28.16 23.21,28.37 23.21,28.93 J4.A6 | D3.3 13.17,29.27 14.07,29.27 15.87,27.47 18.15,27.47 18.71,26.92 20.78,26.92 22.24,28.37 22.31,28.37
EPD_3V3
  Top 0.3: L5.1 1.12,6.14 1.95,6.97 1.95,8.5 C1-EP-DR.2 2.09,8.57 3.54,8.57 4.79,9.81 7.97,9.81 8.8,10.64 8.8,14.59 8.6,14.8 8.6,15.35 8.94,15.7 10.54,15.7 J1.16 10.67,15.7 10.67,16.05 J1.15 10.67,16.18 11.09,16.18 11.64,16.74 12.27,16.74 12.54,16.46 12.54,16.25 EPD_C5.2 12.68,16.18 13.17,16.18 17.18,12.17 17.18,11.82 Q1.3
EPD_BUSY  (via drill 0.15)
  Top 0.15: v25.91,14.11 25.77,14.25 25.77,15.15 U1.P$AD12 | v14.62,15.98 11.51,19.09 10.67,19.09 J1.9
  Bottom 0.15: v25.91,14.11 25.91,14.59 25.29,15.21 15.38,15.21 v14.62,15.98
EPD_CS  (via drill 0.15)
  Top 0.152: v7.67,22.93 8.12,22.48 v8.12,20.12
  Route15 0.152: U1.P$K2 23.96,19.61 25.73,19.61 25.97,19.37 26.19,19.59 27.74,19.59 27.78,19.63 28.04,19.63 28.25,19.42 28.25,19.09 28.5,18.84 28.57,18.9 29.19,18.9 29.23,18.87 31.66,18.87 32.26,19.46 32.26,21.44 35.28,24.46 35.28,27.27 33.13,29.41 31.7,29.41 29.27,31.84 12.04,31.84 11.46,32.43 10.66,32.43 8.81,30.58 11.37,28.03 11.37,26.34 7.79,22.75 7.75,22.75 7.67,22.84 v7.67,22.93 | v8.12,20.12 9.24,19 9.24,17.9 9.48,17.65 J1.12
  other vias: 23.25,18.9 10.62,17.65
EPD_DC  (via drill 0.15)
  Top 0.15: v25.22,14.66 25.22,15.15 U1.P$AD10 | v11.78,18.19 10.67,18.19 J1.11
  Bottom 0.15: v25.22,14.66 15.31,14.66 v11.78,18.19
EPD_RST  (via drill 0.15)
  Route15 0.15: J1.10 11.29,18.65 11.81,19.17 15.42,19.17 16.73,17.86 16.73,17.17 17.44,16.46 21.54,16.46 23.82,14.18 23.82,14.01 24.29,13.54 26.4,13.54 26.44,13.5 | 26.44,13.5 | 26.44,13.5 26.56,13.62 26.56,14.65 26,15.22 25.92,15.3 | 25.91,15.3 25.92,15.3 | 25.92,15.3 25.56,15.65 U1.P$AC11
  other vias: 10.62,18.65 25.5,15.65
GDR  (via drill 0.15)
  Top 0.15: v10.67,5.1 10.47,5.31 10.12,5.31 R2_EP_DR.2 | v11.64,8.43 10.81,8.43 Q3.1 | v9.91,22.35 10.19,22.62 10.6,22.62 J1.2
  Route15 0.15: v10.67,5.1 10.67,7.46 v11.64,8.43
  Bottom 0.15: v9.91,22.35 9.91,20.48 8.66,19.23 8.66,11.47 11.64,8.5 v11.64,8.43
GND  (via drill 0.15, 0.15 pad 0.3)
  Top 0.15: R2_EP_DR.1 10.05,5.87 9.7,5.52 9.7,5.45 9.15,4.9 C29.1 9.08,4.83 6.73,4.83 4.72,2.82 3.61,2.82 2.36,4.07 2.36,6.84 3.89,8.36 4.79,8.36 D4.1 4.86,8.43 6.45,8.43 7.21,9.19 v8.18,9.19 | 11.71,10.3 11.71,10.85 EPD_C11.1 11.64,10.92 11.64,11.75 EPD_C10.1 11.57,11.82 11.57,12.72 EPD_C9.1 11.51,12.72 11.51,13.55 EPD_C8.1 11.51,13.62 11.51,14.52 EPD_C7.1 11.57,14.52 11.57,15.35 EPD_C6.1 | 11.71,10.3 11.71,9.95 EPD_C12.1 | EPD_C5.1 11.99,16.18 11.99,15.77 11.64,15.42 EPD_C6.1 | J1.17 10.67,15.15 11.51,15.15 EPD_C6.1 | 14.41,6.14 15.38,6.14 16.42,7.18 SJ1.1 | 14.41,6.14 12.4,6.14 R_TYPE_SEL.1 | SW_DN.1 13.44,4 14.07,4.62 v14.41,4.62 20.09,4.62 C31.1 20.16,4.69 20.16,5.38 21.41,6.63 22.31,6.63 24.39,4.55 24.39,4 SW_ENT.1 24.45,3.93 25.84,3.93 26.95,2.82 28.4,2.82 29.09,3.51 29.09,5.38 | v14.41,6.07 14.41,6.14 | v11.09,10.3 11.71,10.3 | U3.9 43.77,8.71 43.08,8.01 42.8,8.01 U3.4 42.74,7.94 42.74,4.55 42.18,4 TP_GND.TP 42.11,3.93 37.54,3.93 37.4,3.79 37.34,3.79 | U3.6 44.67,8.5 44.05,8.5 43.84,8.71 U3.9 | U3.1 42.8,9.47 43.08,9.47 43.77,8.77 U3.9 | IC2.B3 24.04,12.31 24.8,12.31 25.29,12.79 C21.2 25.35,12.79 25.91,12.79 27.43,11.27 29.65,11.27 | C8.2 29.16,14.73 29.99,14.73 30.34,14.38 30.34,14.11 30.13,13.9 30.13,13.28 C32.1 30.2,13.28 30.48,13 30.48,12.1 29.65,11.27 | 22.03,12.31 21.82,12.31 21.48,12.65 C19.2 | 22.03,12.31 23,12.31 IC2.B1 | C20.2 18.78,14.45 19.26,14.45 20.51,13.21 20.51,12.45 20.71,12.24 21.13,12.24 21.48,12.58 C19.2 | 21.03,15.25 21.41,14.87 21.41,12.72 C19.2 | 21.03,15.25 20.78,15.49 20.78,15.63 C6.2 | 37.34,3.79 37.34,3.44 37.13,3.23 36.64,3.23 35.95,3.93 35.47,3.93 SW_UP.1
  Top 0.15: 37.34,3.79 36.92,4.2 C30.1 36.85,4.2 36.85,5.04 35.4,6.49 35.33,6.49 35.19,6.63 C34.1 35.12,6.7 34.91,6.7 34.56,7.04 31.66,7.04 TP_BAT_GND.TP | 22.03,12.31 22.03,10.64 27.29,5.38 29.09,5.38 | 29.09,5.38 29.93,5.38 31.59,7.04 TP_BAT_GND.TP | 29.65,11.27 29.65,9.05 31.59,7.11 TP_BAT_GND.TP | 21.61,23.59 21.48,23.59 C37.1 | 21.61,23.59 22.38,22.83 22.38,22 22.31,21.93 C5.1 | 20.09,25.32 20.09,23.59 | 20.09,23.59 20.09,23.32 IC1.D2 | 20.09,25.32 20.58,25.81 C39.2 20.65,25.88 20.99,26.23 22.1,26.23 R9.1 | R9.1 22.17,26.3 22.17,26.78 22.93,27.54 23,27.54 23.21,27.75 C38.1 23.28,27.75 24.39,27.75 25.29,26.85 26.25,26.85 26.91,27.51 | C33.2 15.66,24.01 16.56,24.01 17.95,25.39 20.09,25.39 20.09,25.32 | 21.61,23.59 21.61,23.94 22.1,24.43 22.1,25.12 22.52,25.53 22.52,26.02 22.24,26.3 R9.1 | C1-EP-DR.1 1.05,8.57 1.19,8.57 2.85,10.23 7.35,10.23 J1.MP2 8.04,10.92 8.04,17.43 10.26,19.65 10.26,19.72 | IC9.C1 13.17,24.7 13.44,24.7 IC9.C2 13.58,24.7 13.86,24.7 IC9.C3 | IC9.B1 13.1,25.05 13.1,24.77 IC9.C1 | 12.13,23.87 12.13,22.14 EPD_C2.1 | 12.13,23.87 13.03,24.77 IC9.C1 | 12.13,23.87 8.94,23.87 | 8.94,23.87 8.04,23.87 J1.MP1 | IC3.8 18.84,19.16 18.43,19.16 IC3.9 18.43,19.23 18.08,19.58 17.46,19.58 17.05,19.16 15.8,19.16 15.59,19.37 15.59,19.58 C17.1 15.52,19.65 15.31,19.65 14.79,20.17 | 14.79,20.17 14.34,20.62 14,20.62 C25.2 13.93,20.62 13.37,20.06 12.68,20.06 12.2,20.55 12.06,20.55 EPD_C1.1 11.99,20.55 11.85,20.55 11.02,19.72 10.67,19.72 J1.8 10.6,19.72 10.26,19.72 | 14.79,20.17 15.8,21.17 15.8,21.72 C18.1 15.94,21.79 15.94,22 16.14,22.21 16.14,22.76 16.98,23.59 20.09,23.59
  Top 0.15: 8.94,23.87 8.94,21.03 10.26,19.72 | X1.2 34.91,18.75 34.7,18.75 33.53,19.92 X1.4 33.46,19.92 32.07,19.92 30.27,21.72 30.27,22.07 C1.2 30.2,22.14 30.2,22.35 | C22.2 38.44,29.06 38.44,28.86 37.82,28.23 36.64,28.23 C4.2 36.57,28.09 36.57,28.03 36.3,27.75 35.81,27.75 | 35.81,27.75 35.53,28.03 35.53,29.06 C3.2 | C15.2 25.56,23.39 25.77,23.18 26.53,23.18 C13.2 26.67,23.18 27.16,23.18 27.36,23.39 28.4,23.39 | 28.44,22.59 28.47,22.62 28.68,22.62 C12.2 28.75,22.62 29.93,22.62 30.2,22.35 | 28.44,22.59 28.19,22.35 27.99,22.35 C10.2 | 28.4,23.39 28.4,22.62 28.44,22.59 | 28.4,23.39 28.4,25.46 C16.2 28.33,25.53 28.33,26.09 26.91,27.51 | 30.2,22.35 30.27,22.35 30.69,22.76 32.14,22.76 32.42,22.49 32.42,22.35 C2.2 32.49,22.28 32.56,22.21 34.98,22.21 C27.1 34.98,22.28 35.81,23.11 35.81,27.75 | 10.74,30.93 10.74,30.66 10.26,30.17 9.7,30.17 C42.2 | 10.74,30.93 10.4,31.28 5.06,31.28 4.79,31 C43.2 | C24.1 12.89,27.89 12.89,28.37 12.34,28.93 12.34,29.69 12.89,30.24 13.1,30.24 D3.2 13.17,30.24 13.51,30.24 15.8,27.96 19.4,27.96 C23.1 | R2_USB.2 20.58,27.47 20.02,27.47 19.47,28.03 C23.1 | 19.47,28.65 19.47,28.09 C23.1 | 19.47,28.65 19.75,28.93 J4.A12_B1 | 26.01,28.41 26.19,28.58 26.19,28.93 J4.A1_B12 26.25,28.99 26.74,28.99 27.29,29.55 J4.SH3 | 26.01,28.41 25.7,28.09 25.7,27.54 R1_USB.1 | 38.23,15.21 38.23,15.63 J2.5 | 38.23,15.21 38.23,14.45 J2.3 | C14.2 24.18,21.79 24.45,21.52 24.45,21.17 U1.P$B7 24.45,21.1 24.45,20.41 24.25,20.2 U1.P$75 | v17.88,15.77 17.32,15.77 R3.1 | v27.57,14.66 26.95,14.66 C7.2 | 29.79,19.3 29.79,18.89 C9.2 | 29.79,19.3 29.65,19.44 v29.63,19.51 | 29.79,19.3 30.06,19.3 30.76,19.99 30.76,20.27 30.34,20.69 29.86,20.69 C11.2
  Top 0.15: v37.61,15.21 38.23,15.21 | 19.47,28.65 19.47,28.72 18.64,29.55 J4.SH4 | 10.74,30.93 11.02,30.93 13.72,33.64 18.64,33.64 J4.SH2 | U1.P$74 26.05,18.33 26.53,17.85 U1.P$85 | 26.01,28.41 26.91,27.51 | v21.48,15.7 21.03,15.25
  Top 0.152: U1.P$F23 29.14,19.51 v29.63,19.51
  Route2 0.152: v29.63,19.51 29.81,19.34 29.81,18.82
  Bottom 0.15: v14.41,4.62 v14.41,6.07 14.41,6.28 12.3,8.39 | v11.09,10.3 11.09,9.61 12.3,8.39 | v8.18,9.19 8.18,8.5 9.15,7.53 11.44,7.53 12.3,8.39 | 21.48,15.77 23.35,15.77 24.18,16.6 U1.P$87 | 21.48,15.77 v17.88,15.77 | v27.57,14.66 27.57,16.39 27.78,16.6 U1.P$90 | v37.61,15.21 37.06,15.21 32.76,19.51 29.65,19.51 v29.63,19.51 | v21.48,15.7 21.48,15.77
  pour Route2: 14.58,1.89 14.59,1.86 14.59,0.14 20.55,0.14 20.55,1.8 20.56,1.82 20.64,1.91 20.67,1.92 25.28,1.92 25.31,1.91 25.39,1.82 25.4,1.8 25.4,0.28 25.49,0.2 31.46,0.2 31.48,0.22 31.48,1.67 31.5,1.7 31.71,1.91 31.74,1.92 36.14,1.92 36.17,1.91 36.23,1.84 36.35,1.84 36.4,1.89 36.43,1.91 36.46,1.91 36.49,1.89 36.51,1.87 36.52,1.84 36.52,0.19 40.46,0.19 40.79,0.51 40.82,0.53 41.26,0.53 45.48,4.74 45.48,20.78 44.66,21.59 44.65,21.62 44.65,27.72 42.22,30.15 34.65,30.15 34.59,30.1 34.57,30.09 34.54,30.09 34.51,30.1 34.49,30.12 34.48,30.15 34.48,31.92 31.87,34.52 28.73,34.52 28.7,34.54 28.48,34.76 10.29,34.76 8.07,32.54 8.04,32.53 4.12,32.53 1.17,29.59 1.17,26.91 2.98,25.1 7.28,25.1 7.31,25.09 7.33,25.07 7.34,25.04 7.34,12.64 8.16,11.82 8.17,11.8 8.17,11.77 8.16,11.74 7.44,11.02 7.41,11 7.36,11 7.24,10.88 7.24,9.98 7.23,9.96 7.21,9.93 7.18,9.92 0.4,9.92 0.4,5.53 3.99,1.94 5.65,1.94 5.66,1.94 5.66,1.94 5.66,1.94 5.68,1.93 5.69,1.92 5.69,1.92 5.69,1.92 5.69,1.92 14.53,1.92 14.56,1.91
  pour Top (isolate 0.15): -0.32,3.99 -0.33,3.96 -4.3,-0.01 44.59,-0.01 50.19,5.59 44.72,11.05 44.71,11.08 44.71,29.16 44.3,29.57 34.94,29.57 34.91,29.59 33.79,30.7 33.78,30.73 33.78,33.09 32.9,33.97 4.1,33.97 0,13.14 0,13.14 0,13.13 -0.01,13.12 -0.01,13.11 -0.01,13.11 -0.02,13.1 -0.02,13.1 -0.03,13.09 -0.03,13.09 -0.04,13.08 -0.05,13.08 -0.05,13.08 -0.06,13.07 -0.07,13.07 -0.08,13.07 -0.08,13.07 -0.32,13.07
HAPTIC_EN  (via drill 0.15, 0.15 pad 0.3)
  Top 0.15: v20.36,17.25 20.63,16.98 22.24,16.98 22.29,16.92 22.52,16.92 U1.P$U1
  Route15 0.15: IC2.A1 20.21,12.81 20.14,12.73 19.78,13.1 | 19.78,13.1 | 19.78,13.1 20.46,13.78 20.46,14.03 19.04,15.45 19.04,15.53 19.51,16 v19.51,16.12
  Bottom 0.15: v19.51,16.12 20.37,16.98 20.37,17.25 v20.36,17.25
  other vias: 23.02,12.81
IMU_INT1  (via drill 0.15 pad 0.3)
  Top 0.15: U1.P$N1 22.72,18.12 v22.45,18.12 v22.44,18.13 | v20.37,18.12 IC3.5
  Bottom 0.15: v20.37,18.12 22.38,18.12 v22.44,18.13
IMU_INT2  (via drill 0.15, 0.15 pad 0.3)
  Top 0.15: IC3.6 19.54,18.54 20.16,18.54 20.23,18.61 20.51,18.61 21.68,17.43 22.52,17.43 v22.52,17.38
  Top 0.152: IC3.6 19.51,18.51
  Bottom 0.15: v22.52,17.38 22.46,17.44 22.42,17.44 22.41,17.45 22.46,17.45 22.95,17.85 23,17.9 U1.P$P2
  other vias: 23.25,17.9
LX1
  Top 0.15: IC9.B2 13.51,25.12 13.86,25.12 IC9.B3 13.93,25.12 14,25.12 14.27,25.39 14.27,25.6 13.86,26.02 13.86,26.16 13.51,26.5 11.3,26.5 10.67,25.88 9.22,25.88 7.97,27.13 L7.1
LX2
  Top 0.15: IC9.D2 13.51,24.29 13.86,24.29 IC9.D3 13.93,24.36 14.07,24.36 14.55,24.84 14.55,25.74 14.14,26.16 14.14,26.3 13.65,26.78 10.4,26.78 10.05,27.13 L7.2
MOSI  (via drill 0.15)
  Top 0.15: J1.14 10.56,16.59 v9.41,16.59
  Route15 0.15: v9.41,16.59 8.7,17.3 7.64,17.3 7.48,17.46 7.48,21.89 12.21,26.62 13.96,26.62 15.5,28.16 15.5,29.5 15.84,29.84 16.95,29.84 18.24,28.55 18.24,27.31 19.45,26.1 19.75,26.1 20.27,26.62 22.97,26.62 25.38,24.2 25.38,22.38 25.69,22.07 25.69,21.46 U1.P$B13
  other vias: 26,21.15
N$1
  Top 0.15: U1.P$C1 22.72,20.69 22.59,20.82 22.52,20.82 22.24,21.1 22.24,21.38 C5.2
N$2
  Top 0.15: 24.14,23.2 L2.2 24.11,23.25 24.04,23.25 23.69,22.9 23.69,21.45 23.55,21.31 23.55,21.17 U1.P$B3
N$3
  Top 0.15: L2.1 24.32,22.9 24.52,22.9 24.8,23.18 24.8,25.39 25.35,25.95 L3.2
N$4  (via drill 0.15)
  Top 0.15: v29.23,21.79 29.09,21.66 28.82,21.66 U1.P$A23 | v30.82,21.79 31.45,21.79 31.93,22.28 C2.1 31.86,22.14 32.14,21.86 32.76,21.86 34.7,19.92 34.91,19.92 X1.3
  Bottom 0.15: v30.82,21.79 v29.23,21.79
N$6  (via drill 0.15)
  Top 0.15: v21.89,13.69 21.89,14.38 23.07,15.56 23.35,15.56 23.41,15.63 23.97,15.63 U1.P$AC5 | v19.4,13.69 18.98,13.69 18.78,13.48 C20.1
  Bottom 0.15: v19.4,13.69 v21.89,13.69
N$11
  Top 0.15: U1.P$N24 29.3,18.19 29.65,18.19 29.79,18.33 C9.1
N$13
  Top 0.15: U1.P$D23 28.82,20.41 29.02,20.41 29.3,20.69 C11.1
N$14
  Top 0.15: U1.P$A18 27.22,21.66 27.22,21.86 26.6,22.49 26.6,22.62 C13.1
N$15  (via drill 0.15)
  Top 0.15: L1.1 35.77,29.57 35.22,29.57 34.97,29.31 C3.1 34.97,29.01 v33.85,27.89
  Route15 0.15: U1.P$H23 29.24,19.89 29.24,20.58 28.73,21.09 28.73,23.27 33.09,27.62 33.82,27.62 33.85,27.66 v33.85,27.89
  other vias: 28.75,19.4
N$16  (via drill 0.15, 0.15 pad 0.3)
  Top 0.15: 27.5,25.46 26.25,25.46 25.42,24.63 L3.1 | 27.5,25.46 27.78,25.46 C16.1 | v30.27,20.13 29.3,20.13 U1.P$E24 | v27.5,22.9 27.5,22.35 C10.1 | C15.1 25.42,22.35 v24.8,22.35 24.8,22.09 v25.06,21.84 | v27.5,24.98 27.5,25.46
  Route15 0.15: U1.P$B5 24.22,21.37 25.14,21.37 25.39,21.62 25.39,21.69 25.23,21.86 25.06,21.86 v25.06,21.84
  Bottom 0.15: v27.5,22.9 v30.27,20.13 | v24.8,22.35 25.36,22.35 26.05,21.66 26.46,21.66 27.57,22.76 v27.5,22.9 | v27.5,22.9 v27.5,24.98
  other vias: 24,21.15
N$17
  Top 0.15: ANT1.1 36.92,31.16 L1.2 | L1.2 37.18,29.07 C22.1 | L1.2 36.48,29.12 36.07,28.71 C4.1
N$18
  Top 0.15: 29.72,21.59 29.3,21.17 U1.P$B24 | 29.72,21.59 29.72,22.07 C1.1 | 29.72,21.59 29.99,21.59 32.83,18.75 33.46,18.75 X1.1
N$19
  Top 0.15: U1.P$D2 23.21,20.34 18.01,20.34 X2.1 17.95,20.34 17.81,20.34 17.11,19.65 16.07,19.65 C17.2
N$20  (via drill 0.15)
  Top 0.15: v20.07,19.72 20.33,19.99 22.86,19.99 22.93,19.92 23.21,19.92 U1.P$F2 | 16.63,21.52 v16.63,20.13 | 16.63,21.52 16.42,21.72 C18.2 | 16.63,21.52 17.95,22.83 X2.2
  Route15 0.15: v20.07,19.72 20.07,18.65 19.05,17.64 18.64,17.64 17.74,18.54 17.74,19.02 v16.63,20.13
N$24
  Top 0.15: IC1.D1 20.58,23.39 21.34,24.15 21.41,24.15 21.82,24.56 21.82,25.39 22.1,25.67 R9.2
N$28
  Top 0.15: IC9.E1 13.1,23.87 13.1,23.73 13.37,23.45 16.42,23.45 17.39,24.43 18.94,24.43 R2.2
N$29
  Top 0.15: IC9.D1 13.1,24.29 13.03,24.29 12.75,24.01 12.75,23.32 14,22.07 14,21.79 14.9,20.89 R4.2
N$31
  Top 0.15: R3.2 17.32,16.32 17.32,17.09 17.81,17.57 IC3.1
N$32  (via drill 0.15)
  Top 0.15: v23.76,13.28 23.55,13.07 23.55,12.86 IC2.A2 | v29.93,12.17 29.93,12.51 30.06,12.65 C32.2
  Bottom 0.15: v23.76,13.28 28.82,13.28 v29.93,12.17
N$40
  Top 0.15: R1_USB.2 26.19,27.47 26.05,27.33 26.05,27.26 25.91,27.13 25.42,27.13 24.32,28.23 24.32,28.93 J4.A5
N$41
  Top 0.15: R2_USB.1 20.65,28.03 20.85,28.03 21.2,28.37 21.2,28.93 J4.B5
N$43
  Top 0.15: EPD_C2.2 13.1,22.07 12.96,22.07 12.47,21.59 10.67,21.59 J1.4
N$44
  Top 0.15: EPD_C1.2 12.96,20.62 12.82,20.62 12.27,21.17 10.67,21.17 J1.5
N$46  (via drill 0.15)
  Top 0.15: v13.24,15.35 12.61,15.35 EPD_C6.2 | v9.91,14.66 10.6,14.66 J1.18
  Bottom 0.15: v13.24,15.35 10.6,15.35 v9.91,14.66
N$47  (via drill 0.15)
  Top 0.15: v13.58,14.45 12.61,14.45 EPD_C7.2 | v9.15,15.15 9.15,14.8 9.77,14.18 10.6,14.18 J1.19
  Bottom 0.15: v13.58,14.45 10.33,14.45 10.05,14.18 9.77,14.18 9.15,14.8 v9.15,15.15
N$48  (via drill 0.15)
  Top 0.15: v13.17,13.62 12.54,13.62 EPD_C8.2 | v9.57,13.76 10.54,13.76 10.6,13.69 J1.20
  Bottom 0.15: v13.17,13.62 9.7,13.62 v9.57,13.76
N$50
  Top 0.15: EPD_C10.2 12.61,11.75 12.75,11.75 13.44,11.06 13.44,9.33 12.4,8.29 12.13,8.29 11.78,7.94 10.19,7.94 9.77,8.36 9.77,12.1 10.26,12.58 10.6,12.58 J1.22
N$52
  Top 0.15: EPD_C12.2 12.68,9.88 12.54,9.88 12.06,9.4 11.37,9.4 10.6,10.16 10.6,11.61 J1.24
N$54
  Top 0.15: 4.65,4.62 6.1,4.62 7.14,5.66 8.32,5.66 D5.2 8.39,5.73 9.01,6.35 11.57,6.35 12.82,7.6 12.82,7.74 Q3.3 | 4.65,4.62 4.16,4.62 C2-EP-DR.2 | 4.65,4.62 4.65,3.3 4.44,3.1 3.75,3.1 3.12,3.72 3.12,6.07 L5.2
N$55
  Top 0.15: C2-EP-DR.1 4.09,3.65 3.54,4.2 3.54,5.1 4.03,5.59 4.03,6.28 4.79,7.04 D2.1 4.86,7.11 5.55,7.11 6.8,8.36 8.32,8.36 D4.2
N$58
  Top 0.15: 11.92,5.94 12.13,5.73 12.2,5.73 12.34,5.59 R_TYPE_SEL.2 | 11.92,5.94 11.23,5.94 R1_EP_DR.1 | 11.92,5.94 11.92,6.21 13.03,7.32 14.83,7.32 15.73,8.22 17.11,8.22 17.95,7.39 17.95,7.25 SJ1.2
OUT+  (via drill 0.15)
  Top 0.15: v24.52,12.79 24.04,12.79 IC2.A3 | v32.83,10.44 33.59,10.44 35.47,8.57 TP_OP.TP
  Bottom 0.15: v24.52,12.79 28.68,12.79 31.03,10.44 v32.83,10.44
OUT-
  Top 0.15: IC2.C3 24.04,11.75 24.04,10.37 27.71,6.7 TP_ON.TP
P0.13/1.5D
  Top 0.15: SW_UP.2 32.56,4 32.42,4.13 32.42,5.8 32.76,6.14 33.46,6.14 R5.1 33.53,6.21 34.08,5.66 34.91,5.66 36.02,4.55 36.02,4.41 36.64,3.79 36.71,3.79 36.85,3.65 C30.2
P0.14/1.5D
  Top 0.15: C31.2 20.16,4.07 21.48,4.07 21.55,4 SW_ENT.2 21.27,4.13 21.27,5.94 21.55,6.21 21.68,6.21 R8.1
P1.01/1.6C
  Top 0.15: R_PWR_EPD.1 14.97,11.13 15.11,10.99 15.18,10.99 16.21,9.95 16.21,9.74 Q1.1
P1.02/1.6C
  Top 0.15: C29.2 9.15,4.27 10.26,4.27 10.54,4 SW_DN.2 10.47,4.13 11.23,4.9 12.4,4.9 13.17,5.66 14,5.66 R7.1
PMIC_INT  (via drill 0.15)
  Route15 0.15: U1.P$T2 22.95,17.7 22.95,18.3 20.48,20.77 20.48,22.06 IC1.A1
  other vias: 23.25,17.4 20.54,22.12
PREVGH  (via drill 0.15)
  Top 0.15: v13.17,12.72 12.54,12.72 EPD_C9.2 | v9.91,12.86 10.19,13.14 10.6,13.14 J1.21 | v5.83,5.66 4.86,5.66 D5.1
  Bottom 0.15: v9.91,12.86 10.05,12.72 v13.17,12.72 13.17,12.65 14.9,10.92 14.9,4.48 14.55,4.13 12.47,4.13 10.95,5.66 v5.83,5.66
PREVGL  (via drill 0.15)
  Top 0.15: 10.81,9.54 10.05,10.3 10.05,11.89 10.26,12.1 10.6,12.1 J1.23 | 10.81,9.54 11.23,9.12 12.82,9.12 13.17,9.47 13.17,10.3 12.75,10.71 12.75,10.85 EPD_C11.2 | v9.29,8.01 8.39,7.11 D2.2 | 10.81,9.54 v10.4,9.12
  Bottom 0.15: v10.4,9.12 v9.29,8.01
RESE  (via drill 0.15)
  Top 0.15: v11.78,5.45 11.23,5.45 R1_EP_DR.2 | v11.64,7.04 10.88,7.04 10.81,7.11 Q3.2 | v9.43,21.24 10.33,22.14 10.6,22.14 J1.3
  Bottom 0.15: v11.78,5.45 11.78,6.9 v11.64,7.04 9.22,7.04 7.7,8.57 7.7,18.68 9.43,20.41 v9.43,21.24
RESET  (via drill 0.15)
  Top 0.15: 36.99,15.7 36.99,16.18 37.75,16.95 37.75,23.39 41.35,26.99 42.32,26.99 43.08,26.23 43.08,24.43 40.45,21.79 TP_RESET.TP | 36.99,15.7 J2.6 | U1.P$AC13 26.02,15.63 v26.51,15.63 | v34.22,16.9 35.43,16.9 36.63,15.7 36.99,15.7
  Route15 0.15: v26.51,15.63 28.47,15.63 30.03,17.19 33.91,17.19 34.06,17.04 | 34.06,17.04 | 34.06,17.04 34.2,16.9 v34.22,16.9
SCK  (via drill 0.15)
  Top 0.15: v26.25,22.14 25.77,21.66 U1.P$A12 | v9.91,18.68 9.91,17.57 10.33,17.15 10.6,17.15 J1.13
  Bottom 0.15: v26.25,22.14 26.25,26.16 28.68,28.58 28.68,31.35 28.33,31.7 27.85,31.7 26.53,30.38 26.53,29.76 24.66,27.89 17.74,27.89 9.91,20.06 v9.91,18.68
SCL/1.4C  (via drill 0.15)
  Top 0.15: v22.52,11.82 23,11.82 IC2.C1 | v43.29,9.95 45.02,9.95 45.3,9.68 45.3,9.26 45.02,8.98 44.74,8.98 U3.7
  Bottom 0.15: v22.52,11.82 29.23,11.82 31.1,9.95 v43.29,9.95
SCL/2.4C  (via drill 0.15)
  Top 0.15: 17.32,18.19 17.81,18.19 IC3.12 | 17.32,18.19 16.35,18.19 15.59,18.95 14.9,18.95 R17.2 | v21.68,20.82 21.68,21.79 20.99,22.49 20.58,22.49 IC1.B1 | U1.P$M2 22.98,18.4 v22.97,18.41 | v17.32,17.78 17.32,18.19 | R18.2 15.11,16.39 15.11,15.42 21.34,9.19 21.34,8.84 TP_SCL.TP 21.41,8.77 26.12,4.07 27.85,4.07 TP_SDA.TP | v14.48,22.14 14.9,21.72 14.9,21.52 R4.1 | v11.99,19.92 11.99,19.44 15.04,16.39 R18.2 | v15.66,16.39 15.18,16.39 R18.2
  Bottom 0.15: 21.68,19.92 v21.68,20.82 | 21.68,19.92 22.66,18.95 v22.97,18.41 | 21.68,19.92 21.61,19.92 20.92,19.23 19.19,19.23 17.74,17.78 v17.32,17.78 17.05,17.78 v15.66,16.39 | v14.48,22.14 14.21,22.14 v11.99,19.92
SDA/1.4C  (via drill 0.15)
  Route15 0.15: IC2.B2 24.15,12.31 25.98,10.47 30.64,10.47 31.78,9.34 36.86,9.34 36.88,9.36 40.74,9.36 40.94,9.15 43.37,11.58 43.51,11.58 44.61,10.48 44.61,9.58 U3.8
  other vias: 23.52,12.31 44.71,9.48
SDA/2.4C  (via drill 0.15)
  Top 0.15: v21,18.67 22.73,18.67 U1.P$L1 | v18.84,18.26 18.43,17.85 18.43,17.64 IC3.2 | v18.16,24.9 18.24,24.98 18.87,24.98 R2.1 19.58,24.87 v19.64,24.94
  Route15 0.15: v18.84,18.26 18.16,18.95 v18.16,24.9 17.47,24.21 v17.47,22.3 | IC1.C1 20.39,22.92 v19.9,22.43
  Bottom 0.15: v21,18.67 19.25,18.67 v18.84,18.26 | v19.9,22.43 17.88,22.43 17.73,22.28 17.5,22.28 v17.47,22.3
  other vias: 20.53,22.92
SWDCLK  (via drill 0.15)
  Top 0.15: v30.41,16.11 29.3,16.11 U1.P$AA24 | v36.37,13.83 36.92,14.38 J2.4 | v42.6,19.02 43.57,19.99 TP_SWDCLK.TP
  Bottom 0.15: v30.41,16.11 31.86,16.11 34.43,13.55 36.09,13.55 v36.37,13.83 36.85,13.83 38.1,15.08 38.1,15.21 41.91,19.02 v42.6,19.02
SWDIO
  Top 0.15: U1.P$AC24 29.3,15.63 32.35,15.63 34.56,13.41 36.16,13.41 36.37,13.21 36.92,13.21 J2.2 36.71,13.14 36.71,11.61 37.61,10.71 37.61,6.97 TP_SWDIO.TP
SWO
  Top 0.15: U1.P$AD22 28.19,15.15 28.19,13.07 28.12,13 TP_SWO.TP
VBAT/1.2A
  Top 0.3: U3.3 42.74,8.5 42.74,8.91 U3.2 42.6,8.98 42.32,8.98 41.77,9.54 41.77,19.51 41,20.27 40.94,20.41 | 40.94,20.41 43.5,22.97 43.5,26.36 42.46,27.4 41.21,27.4 35.47,21.66 35.05,21.66 C27.2 | 40.94,20.41 39.97,20.41 39.14,21.24 39.14,23.11 41.77,25.74 TP_VBAT.TP
VBAT/2.5C  (via drill 0.15)
  Top 0.3: v19.68,23.11 19.88,22.9 20.09,22.9 IC1.C2 | v21.89,22.69 21.48,23.11 C37.2
  Route15 0.3: v19.68,23.11 19.68,23.94 21.06,25.32 22.72,25.32 23.28,24.77 23.28,24.08 v21.89,22.69
VBUS/1.5D  (via drill 0.15)
  Top 0.3: C43.1 3.75,30.93 4.3,30.38 5.13,30.38 5.41,30.66 9.63,30.66 C42.1 9.77,30.8 v10.26,30.8 | 20.85,29.96 20.85,30.31 20.23,30.93 16.7,30.93 16.07,30.31 15.66,30.31 D3.5 | 20.85,29.96 20.85,29.76 20.65,29.55 20.65,28.99 J4.A9_B4 | v24.94,29.96 25.35,29.55 25.35,28.99 J4.A4_B9 | 20.85,29.96 v21.68,29.96
  Bottom 0.3: v24.94,29.96 v21.68,29.96 21.55,30.03 20.65,30.93 18.36,30.93 18.22,30.8 v10.26,30.8
VBUS/2.6D  (via drill 0.15)
  Top 0.152: U1.P$AD2 23.25,15.26
  Top 0.3: 23.28,14.59 23.28,15.08 U1.P$AD2 | 23.28,14.59 24.25,13.62 25.08,13.62 25.22,13.76 C21.1 | v19.88,21.72 20.09,21.93 20.09,22.07 IC1.A2 | v22.59,24.56 22.59,25.05 23.21,25.67 23.21,27.2 C38.2 | v22.79,14.18 23.14,14.52 23.28,14.59
  Bottom 0.3: v22.59,24.56 19.88,21.86 v19.88,21.72 19.81,21.59 14.41,21.59 11.23,18.4 11.23,17.98 11.57,17.64 11.71,17.64 15.11,14.25 22.1,14.25 22.17,14.18 v22.79,14.18
VREG  (via drill 0.15)
  Top 0.15: 13.37,25.53 13.44,25.53 IC9.A2 13.51,25.53 13.86,25.53 IC9.A3 | 13.37,25.53 13.17,25.53 IC9.A1 | v13.37,26.02 13.37,25.53 | v13.37,27.26 13.93,27.82 C24.2 14,27.82 14.14,27.82 15.66,26.3 TP_VREG.TP 15.73,26.3 v17.05,26.3 | v21.13,21.72 20.65,21.24 19.75,21.24 19.4,21.59 19.4,21.93 19.95,22.49 20.09,22.49 IC1.B2 | v21.27,24.63 20.85,24.63 20.65,24.84 C39.1 | v18.84,27.4 19.4,27.4 C23.2
  Route15 0.15: v21.13,21.72 21.13,24.49 v21.27,24.63
  Bottom 0.15: v13.37,27.26 v13.37,26.02 | 18.84,27.06 v18.84,27.4 | v21.27,24.63 18.84,27.06 | v17.05,26.3 18.01,26.3 18.78,27.06 18.84,27.06
(copper drawn outside any net)
  shapes: Bottom area x1